# EAGLE board gameboyzero-original (EAGLE 8.4.1)

Size 702.4 x 426.35 mm. Coordinates in mm from the lower left corner, seen from the top.
Outline: 38.1,81.35 38.1,76.85 104.1,76.85 104.1,74.35 109.1,74.35 109.1,81.35 arc90 108.1,82.35 39.1,82.35 arc90 38.1,81.35
Outline: 38.1,45.35 38.1,7.35 arc90 39.1,6.35 108.1,6.35 arc90 109.1,7.35 109.1,73.35 104.1,73.35 104.1,63.35 66.1,63.35 66.1,60.35 81.1,60.35 81.1,49.35 66.1,49.35 66.1,45.35 38.1,45.35
Outline: 38.1,177.35 38.1,85.35 arc90 39.1,84.35 108.1,84.35 arc90 109.1,85.35 109.1,177.35 arc90 108.1,178.35 39.1,178.35 arc90 38.1,177.35
Outline: 84.76,113.55 73.56,117.63 arc90 72.92,117.33 68.47,105.11 arc90 68.77,104.47 79,100.75 75.1,90.05 87.79,85.43 arc90 88.43,85.73 91.19,93.3 102.39,89.23 arc90 103.03,89.53 107.47,101.74 arc90 107.18,102.38 97.42,105.93 arc-90 97.12,106.58 100.67,116.34 arc90 100.38,116.98 88.16,121.43 arc90 87.52,121.13 84.76,113.55
Outline: 53.45,113.5 65.25,101.7 arc-90 65.25,101 53.45,89.2 arc-90 52.75,89.2 40.95,101 arc-90 40.95,101.7 52.75,113.5 arc-90 53.45,113.5
Outline: 44.1,119.85 44.1,115.85 arc90 44.6,115.35 61.6,115.35 arc90 62.1,115.85 62.1,119.85 arc90 61.6,120.35 44.6,120.35 arc90 44.1,119.85
Outline: 75.03,17.69 80.03,28.43 arc90 79.82,29 arc-90 79.58,29.67 86.02,43.47 arc-90 86.69,43.72 98.47,38.22 arc-90 98.71,37.56 92.79,24.86 arc90 93.03,24.19 arc-90 93.24,23.62 87.72,11.78 arc-90 87.05,11.53 75.27,17.03 arc-90 75.03,17.69
Outline: 71.93,17.03 60.15,11.53 arc-90 59.48,11.78 53.96,23.62 arc-90 54.17,24.19 arc90 54.41,24.86 48.49,37.56 arc-90 48.73,38.22 60.52,43.72 arc-90 61.18,43.47 67.62,29.67 arc-90 67.38,29 arc90 67.17,28.43 72.17,17.69 arc-90 71.93,17.03
Outline: 184.1,60.35 184.1,14.35 184.1,7.35 arc90 185.1,6.35 254.1,6.35 arc90 255.1,7.35 255.1,20.35 255.1,34.35 250.1,34.35 250.1,53.35 255.1,53.35 255.1,60.35 arc90 254.1,61.35 185.1,61.35 arc90 184.1,60.35
Outline: 212.1,10.35 227.1,10.35 227.1,21.35 212.1,21.35 212.1,10.35
Outline: 184.1,177.35 184.1,131.35 184.1,124.35 arc90 185.1,123.35 254.1,123.35 arc90 255.1,124.35 255.1,137.35 255.1,151.35 255.1,170.35 255.1,177.35 arc90 254.1,178.35 185.1,178.35 arc90 184.1,177.35
Outline: 0,25.4 0,0 25.4,0 25.4,25.4 0,25.4
Outline: 111.1,177.35 111.1,172.35 182.1,172.35 182.1,177.35 arc90 181.1,178.35 112.1,178.35 arc90 111.1,177.35
Outline: 111.1,170.35 111.1,133.35 arc90 112.1,132.35 181.1,132.35 arc90 182.1,133.35 182.1,170.35 111.1,170.35
Outline: 157.76,161.55 146.56,165.63 arc90 145.92,165.33 141.47,153.11 arc90 141.77,152.47 152,148.75 148.1,138.04 160.79,133.43 arc90 161.43,133.73 164.19,141.3 175.39,137.23 arc90 176.03,137.53 180.47,149.74 arc90 180.18,150.38 170.42,153.93 arc-90 170.12,154.57 173.68,164.34 arc90 173.38,164.98 161.16,169.43 arc90 160.52,169.13 157.76,161.55
Outline: 126.45,161.5 138.25,149.7 arc-90 138.25,149 126.45,137.2 arc-90 125.75,137.2 113.95,149 arc-90 113.95,149.7 125.75,161.5 arc-90 126.45,161.5
Outline: 117.1,167.85 117.1,163.85 arc90 117.6,163.35 134.6,163.35 arc90 135.1,163.85 135.1,167.85 arc90 134.6,168.35 117.6,168.35 arc90 117.1,167.85
Outline: 111.1,129.35 111.1,124.35 182.1,124.35 182.1,129.35 arc90 181.1,130.35 112.1,130.35 arc90 111.1,129.35
Outline: 111.1,122.35 111.1,85.35 arc90 112.1,84.35 181.1,84.35 arc90 182.1,85.35 182.1,122.35 111.1,122.35
Outline: 157.76,113.55 146.56,117.63 arc90 145.92,117.33 141.47,105.11 arc90 141.77,104.47 152,100.75 148.1,90.05 160.79,85.43 arc90 161.43,85.73 164.19,93.3 175.39,89.23 arc90 176.03,89.53 180.47,101.74 arc90 180.18,102.38 170.42,105.93 arc-90 170.12,106.58 173.68,116.34 arc90 173.38,116.98 161.16,121.43 arc90 160.52,121.13 157.76,113.55
Outline: 126.45,113.5 138.25,101.7 arc-90 138.25,101 126.45,89.2 arc-90 125.75,89.2 113.95,101 arc-90 113.95,101.7 125.75,113.5 arc-90 126.45,113.5
Outline: 117.1,119.85 117.1,115.85 arc90 117.6,115.35 134.6,115.35 arc90 135.1,115.85 135.1,119.85 arc90 134.6,120.35 117.6,120.35 arc90 117.1,119.85
Outline: 111.1,81.35 111.1,76.85 177.1,76.85 177.1,74.35 182.1,74.35 182.1,81.35 arc90 181.1,82.35 112.1,82.35 arc90 111.1,81.35
Outline: 111.1,45.35 111.1,7.35 arc90 112.1,6.35 181.1,6.35 arc90 182.1,7.35 182.1,73.35 177.1,73.35 177.1,63.35 139.1,63.35 139.1,60.35 154.1,60.35 154.1,49.35 139.1,49.35 139.1,45.35 111.1,45.35
Outline: 148.03,17.69 153.03,28.43 arc90 152.82,29 arc-90 152.58,29.67 159.02,43.47 arc-90 159.69,43.72 171.47,38.22 arc-90 171.71,37.56 165.79,24.86 arc90 166.03,24.19 arc-90 166.24,23.62 160.72,11.78 arc-90 160.05,11.53 148.27,17.03 arc-90 148.03,17.69
Outline: 144.93,17.03 133.15,11.53 arc-90 132.49,11.78 126.96,23.62 arc-90 127.17,24.19 arc90 127.41,24.86 121.49,37.56 arc-90 121.73,38.22 133.51,43.72 arc-90 134.18,43.47 140.62,29.67 arc-90 140.38,29 arc90 140.17,28.43 145.17,17.69 arc-90 144.93,17.03
Outline: 184.1,119.1 184.1,73.1 184.1,66.1 arc90 185.1,65.1 254.1,65.1 arc90 255.1,66.1 255.1,79.1 255.1,93.1 250.1,93.1 250.1,112.1 255.1,112.1 255.1,119.1 arc90 254.1,120.1 185.1,120.1 arc90 184.1,119.1
Outline: 212.1,69.1 227.1,69.1 227.1,80.1 212.1,80.1 212.1,69.1
Outline: 257.1,81.35 257.1,76.85 323.1,76.85 323.1,74.35 328.1,74.35 328.1,81.35 arc90 327.1,82.35 258.1,82.35 arc90 257.1,81.35
Outline: 257.1,45.35 257.1,7.35 arc90 258.1,6.35 327.1,6.35 arc90 328.1,7.35 328.1,73.35 323.1,73.35 323.1,63.35 285.1,63.35 285.1,60.35 300.1,60.35 300.1,49.35 285.1,49.35 285.1,45.35 257.1,45.35
Outline: 257.1,177.35 257.1,85.35 arc90 258.1,84.35 327.1,84.35 arc90 328.1,85.35 328.1,177.35 arc90 327.1,178.35 258.1,178.35 arc90 257.1,177.35
Outline: 303.76,113.55 292.56,117.63 arc90 291.92,117.33 287.47,105.11 arc90 287.77,104.47 298,100.75 294.1,90.05 306.79,85.43 arc90 307.43,85.73 310.19,93.3 321.39,89.23 arc90 322.03,89.53 326.48,101.74 arc90 326.18,102.38 316.42,105.93 arc-90 316.12,106.58 319.68,116.34 arc90 319.38,116.98 307.16,121.43 arc90 306.52,121.13 303.76,113.55
Outline: 272.45,113.5 284.25,101.7 arc-90 284.25,101 272.45,89.2 arc-90 271.75,89.2 259.95,101 arc-90 259.95,101.7 271.75,113.5 arc-90 272.45,113.5
Outline: 263.1,119.85 263.1,115.85 arc90 263.6,115.35 280.6,115.35 arc90 281.1,115.85 281.1,119.85 arc90 280.6,120.35 263.6,120.35 arc90 263.1,119.85
Outline: 294.03,17.69 299.03,28.43 arc90 298.82,29 arc-90 298.58,29.67 305.02,43.47 arc-90 305.69,43.72 317.47,38.22 arc-90 317.71,37.56 311.79,24.86 arc90 312.03,24.19 arc-90 312.24,23.62 306.71,11.78 arc-90 306.05,11.53 294.27,17.03 arc-90 294.03,17.69
Outline: 290.93,17.03 279.15,11.53 arc-90 278.49,11.78 272.96,23.62 arc-90 273.17,24.19 arc90 273.41,24.86 267.49,37.56 arc-90 267.73,38.22 279.51,43.72 arc-90 280.18,43.47 286.62,29.67 arc-90 286.38,29 arc90 286.17,28.43 291.17,17.69 arc-90 290.93,17.03
Outline: 403.1,60.35 403.1,14.35 403.1,7.35 arc90 404.1,6.35 473.1,6.35 arc90 474.1,7.35 474.1,20.35 474.1,34.35 469.1,34.35 469.1,53.35 474.1,53.35 474.1,60.35 arc90 473.1,61.35 404.1,61.35 arc90 403.1,60.35
Outline: 431.1,10.35 446.1,10.35 446.1,21.35 431.1,21.35 431.1,10.35
Outline: 403.1,177.35 403.1,131.35 403.1,124.35 arc90 404.1,123.35 473.1,123.35 arc90 474.1,124.35 474.1,137.35 474.1,151.35 474.1,170.35 474.1,177.35 arc90 473.1,178.35 404.1,178.35 arc90 403.1,177.35
Outline: 330.1,177.35 330.1,172.35 401.1,172.35 401.1,177.35 arc90 400.1,178.35 331.1,178.35 arc90 330.1,177.35
Outline: 330.1,170.35 330.1,133.35 arc90 331.1,132.35 400.1,132.35 arc90 401.1,133.35 401.1,170.35 330.1,170.35
Outline: 376.76,161.55 365.56,165.63 arc90 364.92,165.33 360.47,153.11 arc90 360.77,152.47 371,148.75 367.1,138.04 379.79,133.43 arc90 380.43,133.73 383.19,141.3 394.39,137.23 arc90 395.03,137.53 399.48,149.74 arc90 399.18,150.38 389.42,153.93 arc-90 389.12,154.57 392.68,164.34 arc90 392.38,164.98 380.16,169.43 arc90 379.52,169.13 376.76,161.55
Outline: 345.45,161.5 357.25,149.7 arc-90 357.25,149 345.45,137.2 arc-90 344.75,137.2 332.95,149 arc-90 332.95,149.7 344.75,161.5 arc-90 345.45,161.5
Outline: 336.1,167.85 336.1,163.85 arc90 336.6,163.35 353.6,163.35 arc90 354.1,163.85 354.1,167.85 arc90 353.6,168.35 336.6,168.35 arc90 336.1,167.85
Outline: 330.1,129.35 330.1,124.35 401.1,124.35 401.1,129.35 arc90 400.1,130.35 331.1,130.35 arc90 330.1,129.35
Outline: 330.1,122.35 330.1,85.35 arc90 331.1,84.35 400.1,84.35 arc90 401.1,85.35 401.1,122.35 330.1,122.35
Outline: 376.76,113.55 365.56,117.63 arc90 364.92,117.33 360.47,105.11 arc90 360.77,104.47 371,100.75 367.1,90.05 379.79,85.43 arc90 380.43,85.73 383.19,93.3 394.39,89.23 arc90 395.03,89.53 399.48,101.74 arc90 399.18,102.38 389.42,105.93 arc-90 389.12,106.58 392.68,116.34 arc90 392.38,116.98 380.16,121.43 arc90 379.52,121.13 376.76,113.55
Outline: 345.45,113.5 357.25,101.7 arc-90 357.25,101 345.45,89.2 arc-90 344.75,89.2 332.95,101 arc-90 332.95,101.7 344.75,113.5 arc-90 345.45,113.5
Outline: 336.1,119.85 336.1,115.85 arc90 336.6,115.35 353.6,115.35 arc90 354.1,115.85 354.1,119.85 arc90 353.6,120.35 336.6,120.35 arc90 336.1,119.85
Outline: 330.1,81.35 330.1,76.85 396.1,76.85 396.1,74.35 401.1,74.35 401.1,81.35 arc90 400.1,82.35 331.1,82.35 arc90 330.1,81.35
Outline: 330.1,45.35 330.1,7.35 arc90 331.1,6.35 400.1,6.35 arc90 401.1,7.35 401.1,73.35 396.1,73.35 396.1,63.35 358.1,63.35 358.1,60.35 373.1,60.35 373.1,49.35 358.1,49.35 358.1,45.35 330.1,45.35
Outline: 367.03,17.69 372.03,28.43 arc90 371.82,29 arc-90 371.58,29.67 378.02,43.47 arc-90 378.69,43.72 390.47,38.22 arc-90 390.71,37.56 384.79,24.86 arc90 385.03,24.19 arc-90 385.24,23.62 379.71,11.78 arc-90 379.05,11.53 367.27,17.03 arc-90 367.03,17.69
Outline: 363.93,17.03 352.15,11.53 arc-90 351.49,11.78 345.96,23.62 arc-90 346.17,24.19 arc90 346.41,24.86 340.49,37.56 arc-90 340.73,38.22 352.51,43.72 arc-90 353.18,43.47 359.62,29.67 arc-90 359.38,29 arc90 359.17,28.43 364.17,17.69 arc-90 363.93,17.03
Outline: 403.1,119.1 403.1,73.1 403.1,66.1 arc90 404.1,65.1 473.1,65.1 arc90 474.1,66.1 474.1,79.1 474.1,93.1 469.1,93.1 469.1,112.1 474.1,112.1 474.1,119.1 arc90 473.1,120.1 404.1,120.1 arc90 403.1,119.1
Outline: 431.1,69.1 446.1,69.1 446.1,80.1 431.1,80.1 431.1,69.1
Outline: 476.1,81.35 476.1,76.85 542.1,76.85 542.1,74.35 547.1,74.35 547.1,81.35 arc90 546.1,82.35 477.1,82.35 arc90 476.1,81.35
Outline: 476.1,45.35 476.1,7.35 arc90 477.1,6.35 546.1,6.35 arc90 547.1,7.35 547.1,73.35 542.1,73.35 542.1,63.35 504.1,63.35 504.1,60.35 519.1,60.35 519.1,49.35 504.1,49.35 504.1,45.35 476.1,45.35
Outline: 476.1,177.35 476.1,85.35 arc90 477.1,84.35 546.1,84.35 arc90 547.1,85.35 547.1,177.35 arc90 546.1,178.35 477.1,178.35 arc90 476.1,177.35
Outline: 522.76,113.55 511.56,117.63 arc90 510.92,117.33 506.47,105.11 arc90 506.77,104.47 517,100.75 513.1,90.05 525.79,85.43 arc90 526.43,85.73 529.19,93.3 540.39,89.23 arc90 541.03,89.53 545.48,101.74 arc90 545.18,102.38 535.42,105.93 arc-90 535.12,106.58 538.67,116.34 arc90 538.38,116.98 526.16,121.43 arc90 525.52,121.13 522.76,113.55
Outline: 491.45,113.5 503.25,101.7 arc-90 503.25,101 491.45,89.2 arc-90 490.75,89.2 478.95,101 arc-90 478.95,101.7 490.75,113.5 arc-90 491.45,113.5
Outline: 482.1,119.85 482.1,115.85 arc90 482.6,115.35 499.6,115.35 arc90 500.1,115.85 500.1,119.85 arc90 499.6,120.35 482.6,120.35 arc90 482.1,119.85
Outline: 513.03,17.69 518.03,28.43 arc90 517.82,29 arc-90 517.58,29.67 524.02,43.47 arc-90 524.68,43.72 536.47,38.22 arc-90 536.71,37.56 530.79,24.86 arc90 531.03,24.19 arc-90 531.24,23.62 525.71,11.78 arc-90 525.05,11.53 513.27,17.03 arc-90 513.03,17.69
Outline: 509.93,17.03 498.15,11.53 arc-90 497.49,11.78 491.96,23.62 arc-90 492.17,24.19 arc90 492.41,24.86 486.49,37.56 arc-90 486.73,38.22 498.51,43.72 arc-90 499.18,43.47 505.62,29.67 arc-90 505.38,29 arc90 505.17,28.43 510.17,17.69 arc-90 509.93,17.03
Outline: 622.1,60.35 622.1,14.35 622.1,7.35 arc90 623.1,6.35 692.1,6.35 arc90 693.1,7.35 693.1,20.35 693.1,34.35 688.1,34.35 688.1,53.35 693.1,53.35 693.1,60.35 arc90 692.1,61.35 623.1,61.35 arc90 622.1,60.35
Outline: 650.1,10.35 665.1,10.35 665.1,21.35 650.1,21.35 650.1,10.35
Outline: 622.1,177.35 622.1,131.35 622.1,124.35 arc90 623.1,123.35 692.1,123.35 arc90 693.1,124.35 693.1,137.35 693.1,151.35 693.1,170.35 693.1,177.35 arc90 692.1,178.35 623.1,178.35 arc90 622.1,177.35
Outline: 549.1,177.35 549.1,172.35 620.1,172.35 620.1,177.35 arc90 619.1,178.35 550.1,178.35 arc90 549.1,177.35
Outline: 549.1,170.35 549.1,133.35 arc90 550.1,132.35 619.1,132.35 arc90 620.1,133.35 620.1,170.35 549.1,170.35
Outline: 595.76,161.55 584.56,165.63 arc90 583.92,165.33 579.47,153.11 arc90 579.77,152.47 590,148.75 586.1,138.04 598.79,133.43 arc90 599.43,133.73 602.19,141.3 613.39,137.23 arc90 614.03,137.53 618.48,149.74 arc90 618.18,150.38 608.42,153.93 arc-90 608.12,154.57 611.67,164.34 arc90 611.38,164.98 599.16,169.43 arc90 598.52,169.13 595.76,161.55
Outline: 564.45,161.5 576.25,149.7 arc-90 576.25,149 564.45,137.2 arc-90 563.75,137.2 551.95,149 arc-90 551.95,149.7 563.75,161.5 arc-90 564.45,161.5
Outline: 555.1,167.85 555.1,163.85 arc90 555.6,163.35 572.6,163.35 arc90 573.1,163.85 573.1,167.85 arc90 572.6,168.35 555.6,168.35 arc90 555.1,167.85
Outline: 549.1,129.35 549.1,124.35 620.1,124.35 620.1,129.35 arc90 619.1,130.35 550.1,130.35 arc90 549.1,129.35
Outline: 549.1,122.35 549.1,85.35 arc90 550.1,84.35 619.1,84.35 arc90 620.1,85.35 620.1,122.35 549.1,122.35
Outline: 595.76,113.55 584.56,117.63 arc90 583.92,117.33 579.47,105.11 arc90 579.77,104.47 590,100.75 586.1,90.05 598.79,85.43 arc90 599.43,85.73 602.19,93.3 613.39,89.23 arc90 614.03,89.53 618.48,101.74 arc90 618.18,102.38 608.42,105.93 arc-90 608.12,106.58 611.67,116.34 arc90 611.38,116.98 599.16,121.43 arc90 598.52,121.13 595.76,113.55
Outline: 564.45,113.5 576.25,101.7 arc-90 576.25,101 564.45,89.2 arc-90 563.75,89.2 551.95,101 arc-90 551.95,101.7 563.75,113.5 arc-90 564.45,113.5
Outline: 555.1,119.85 555.1,115.85 arc90 555.6,115.35 572.6,115.35 arc90 573.1,115.85 573.1,119.85 arc90 572.6,120.35 555.6,120.35 arc90 555.1,119.85
Outline: 549.1,81.35 549.1,76.85 615.1,76.85 615.1,74.35 620.1,74.35 620.1,81.35 arc90 619.1,82.35 550.1,82.35 arc90 549.1,81.35
Outline: 549.1,45.35 549.1,7.35 arc90 550.1,6.35 619.1,6.35 arc90 620.1,7.35 620.1,73.35 615.1,73.35 615.1,63.35 577.1,63.35 577.1,60.35 592.1,60.35 592.1,49.35 577.1,49.35 577.1,45.35 549.1,45.35
Outline: 586.03,17.69 591.03,28.43 arc90 590.82,29 arc-90 590.58,29.67 597.02,43.47 arc-90 597.68,43.72 609.47,38.22 arc-90 609.71,37.56 603.79,24.86 arc90 604.03,24.19 arc-90 604.24,23.62 598.72,11.78 arc-90 598.05,11.53 586.27,17.03 arc-90 586.03,17.69
Outline: 582.93,17.03 571.15,11.53 arc-90 570.49,11.78 564.96,23.62 arc-90 565.17,24.19 arc90 565.41,24.86 559.49,37.56 arc-90 559.73,38.22 571.51,43.72 arc-90 572.18,43.47 578.62,29.67 arc-90 578.38,29 arc90 578.17,28.43 583.17,17.69 arc-90 582.93,17.03
Outline: 622.1,119.1 622.1,73.1 622.1,66.1 arc90 623.1,65.1 692.1,65.1 arc90 693.1,66.1 693.1,79.1 693.1,93.1 688.1,93.1 688.1,112.1 693.1,112.1 693.1,119.1 arc90 692.1,120.1 623.1,120.1 arc90 622.1,119.1
Outline: 650.1,69.1 665.1,69.1 665.1,80.1 650.1,80.1 650.1,69.1
Outline: 38.1,256.35 38.1,251.85 104.1,251.85 104.1,249.35 109.1,249.35 109.1,256.35 arc90 108.1,257.35 39.1,257.35 arc90 38.1,256.35
Outline: 38.1,220.35 38.1,182.35 arc90 39.1,181.35 108.1,181.35 arc90 109.1,182.35 109.1,248.35 104.1,248.35 104.1,238.35 66.1,238.35 66.1,235.35 81.1,235.35 81.1,224.35 66.1,224.35 66.1,220.35 38.1,220.35
Outline: 38.1,352.35 38.1,260.35 arc90 39.1,259.35 108.1,259.35 arc90 109.1,260.35 109.1,352.35 arc90 108.1,353.35 39.1,353.35 arc90 38.1,352.35
Outline: 84.76,288.55 73.56,292.63 arc90 72.92,292.33 68.47,280.11 arc90 68.77,279.47 79,275.75 75.1,265.05 87.79,260.43 arc90 88.43,260.73 91.19,268.3 102.39,264.23 arc90 103.03,264.53 107.47,276.74 arc90 107.18,277.38 97.42,280.93 arc-90 97.12,281.57 100.67,291.34 arc90 100.38,291.98 88.16,296.43 arc90 87.52,296.13 84.76,288.55
Outline: 53.45,288.5 65.25,276.7 arc-90 65.25,276 53.45,264.2 arc-90 52.75,264.2 40.95,276 arc-90 40.95,276.7 52.75,288.5 arc-90 53.45,288.5
Outline: 44.1,294.85 44.1,290.85 arc90 44.6,290.35 61.6,290.35 arc90 62.1,290.85 62.1,294.85 arc90 61.6,295.35 44.6,295.35 arc90 44.1,294.85
Outline: 75.03,192.69 80.03,203.43 arc90 79.82,204 arc-90 79.58,204.67 86.02,218.47 arc-90 86.69,218.72 98.47,213.22 arc-90 98.71,212.56 92.79,199.86 arc90 93.03,199.19 arc-90 93.24,198.62 87.72,186.78 arc-90 87.05,186.53 75.27,192.03 arc-90 75.03,192.69
Outline: 71.93,192.03 60.15,186.53 arc-90 59.48,186.78 53.96,198.62 arc-90 54.17,199.19 arc90 54.41,199.86 48.49,212.56 arc-90 48.73,213.22 60.52,218.72 arc-90 61.18,218.47 67.62,204.67 arc-90 67.38,204 arc90 67.17,203.43 72.17,192.69 arc-90 71.93,192.03
Outline: 184.1,235.35 184.1,189.35 184.1,182.35 arc90 185.1,181.35 254.1,181.35 arc90 255.1,182.35 255.1,195.35 255.1,209.35 250.1,209.35 250.1,228.35 255.1,228.35 255.1,235.35 arc90 254.1,236.35 185.1,236.35 arc90 184.1,235.35
Outline: 212.1,185.35 227.1,185.35 227.1,196.35 212.1,196.35 212.1,185.35
Outline: 184.1,352.35 184.1,306.35 184.1,299.35 arc90 185.1,298.35 254.1,298.35 arc90 255.1,299.35 255.1,312.35 255.1,326.35 255.1,345.35 255.1,352.35 arc90 254.1,353.35 185.1,353.35 arc90 184.1,352.35
Outline: 111.1,352.35 111.1,347.35 182.1,347.35 182.1,352.35 arc90 181.1,353.35 112.1,353.35 arc90 111.1,352.35
Outline: 111.1,345.35 111.1,308.35 arc90 112.1,307.35 181.1,307.35 arc90 182.1,308.35 182.1,345.35 111.1,345.35
Outline: 157.76,336.55 146.56,340.63 arc90 145.92,340.33 141.47,328.11 arc90 141.77,327.47 152,323.75 148.1,313.05 160.79,308.43 arc90 161.43,308.73 164.19,316.3 175.39,312.23 arc90 176.03,312.53 180.47,324.74 arc90 180.18,325.38 170.42,328.93 arc-90 170.12,329.57 173.68,339.34 arc90 173.38,339.98 161.16,344.43 arc90 160.52,344.13 157.76,336.55
Outline: 126.45,336.5 138.25,324.7 arc-90 138.25,324 126.45,312.2 arc-90 125.75,312.2 113.95,324 arc-90 113.95,324.7 125.75,336.5 arc-90 126.45,336.5
Outline: 117.1,342.85 117.1,338.85 arc90 117.6,338.35 134.6,338.35 arc90 135.1,338.85 135.1,342.85 arc90 134.6,343.35 117.6,343.35 arc90 117.1,342.85
Outline: 111.1,304.35 111.1,299.35 182.1,299.35 182.1,304.35 arc90 181.1,305.35 112.1,305.35 arc90 111.1,304.35
Outline: 111.1,297.35 111.1,260.35 arc90 112.1,259.35 181.1,259.35 arc90 182.1,260.35 182.1,297.35 111.1,297.35
Outline: 157.76,288.55 146.56,292.63 arc90 145.92,292.33 141.47,280.11 arc90 141.77,279.47 152,275.75 148.1,265.05 160.79,260.43 arc90 161.43,260.73 164.19,268.3 175.39,264.23 arc90 176.03,264.53 180.47,276.74 arc90 180.18,277.38 170.42,280.93 arc-90 170.12,281.57 173.68,291.34 arc90 173.38,291.98 161.16,296.43 arc90 160.52,296.13 157.76,288.55
Outline: 126.45,288.5 138.25,276.7 arc-90 138.25,276 126.45,264.2 arc-90 125.75,264.2 113.95,276 arc-90 113.95,276.7 125.75,288.5 arc-90 126.45,288.5
Outline: 117.1,294.85 117.1,290.85 arc90 117.6,290.35 134.6,290.35 arc90 135.1,290.85 135.1,294.85 arc90 134.6,295.35 117.6,295.35 arc90 117.1,294.85
Outline: 111.1,256.35 111.1,251.85 177.1,251.85 177.1,249.35 182.1,249.35 182.1,256.35 arc90 181.1,257.35 112.1,257.35 arc90 111.1,256.35
Outline: 111.1,220.35 111.1,182.35 arc90 112.1,181.35 181.1,181.35 arc90 182.1,182.35 182.1,248.35 177.1,248.35 177.1,238.35 139.1,238.35 139.1,235.35 154.1,235.35 154.1,224.35 139.1,224.35 139.1,220.35 111.1,220.35
Outline: 148.03,192.69 153.03,203.43 arc90 152.82,204 arc-90 152.58,204.67 159.02,218.47 arc-90 159.69,218.72 171.47,213.22 arc-90 171.71,212.56 165.79,199.86 arc90 166.03,199.19 arc-90 166.24,198.62 160.72,186.78 arc-90 160.05,186.53 148.27,192.03 arc-90 148.03,192.69
Outline: 144.93,192.03 133.15,186.53 arc-90 132.49,186.78 126.96,198.62 arc-90 127.17,199.19 arc90 127.41,199.86 121.49,212.56 arc-90 121.73,213.22 133.51,218.72 arc-90 134.18,218.47 140.62,204.67 arc-90 140.38,204 arc90 140.17,203.43 145.17,192.69 arc-90 144.93,192.03
Outline: 184.1,294.1 184.1,248.1 184.1,241.1 arc90 185.1,240.1 254.1,240.1 arc90 255.1,241.1 255.1,254.1 255.1,268.1 250.1,268.1 250.1,287.1 255.1,287.1 255.1,294.1 arc90 254.1,295.1 185.1,295.1 arc90 184.1,294.1
Outline: 212.1,244.1 227.1,244.1 227.1,255.1 212.1,255.1 212.1,244.1
Outline: 257.1,256.35 257.1,251.85 323.1,251.85 323.1,249.35 328.1,249.35 328.1,256.35 arc90 327.1,257.35 258.1,257.35 arc90 257.1,256.35
Outline: 257.1,220.35 257.1,182.35 arc90 258.1,181.35 327.1,181.35 arc90 328.1,182.35 328.1,248.35 323.1,248.35 323.1,238.35 285.1,238.35 285.1,235.35 300.1,235.35 300.1,224.35 285.1,224.35 285.1,220.35 257.1,220.35
Outline: 257.1,352.35 257.1,260.35 arc90 258.1,259.35 327.1,259.35 arc90 328.1,260.35 328.1,352.35 arc90 327.1,353.35 258.1,353.35 arc90 257.1,352.35
Outline: 303.76,288.55 292.56,292.63 arc90 291.92,292.33 287.47,280.11 arc90 287.77,279.47 298,275.75 294.1,265.05 306.79,260.43 arc90 307.43,260.73 310.19,268.3 321.39,264.23 arc90 322.03,264.53 326.48,276.74 arc90 326.18,277.38 316.42,280.93 arc-90 316.12,281.57 319.68,291.34 arc90 319.38,291.98 307.16,296.43 arc90 306.52,296.13 303.76,288.55
Outline: 272.45,288.5 284.25,276.7 arc-90 284.25,276 272.45,264.2 arc-90 271.75,264.2 259.95,276 arc-90 259.95,276.7 271.75,288.5 arc-90 272.45,288.5
Outline: 263.1,294.85 263.1,290.85 arc90 263.6,290.35 280.6,290.35 arc90 281.1,290.85 281.1,294.85 arc90 280.6,295.35 263.6,295.35 arc90 263.1,294.85
Outline: 294.03,192.69 299.03,203.43 arc90 298.82,204 arc-90 298.58,204.67 305.02,218.47 arc-90 305.69,218.72 317.47,213.22 arc-90 317.71,212.56 311.79,199.86 arc90 312.03,199.19 arc-90 312.24,198.62 306.71,186.78 arc-90 306.05,186.53 294.27,192.03 arc-90 294.03,192.69
Outline: 290.93,192.03 279.15,186.53 arc-90 278.49,186.78 272.96,198.62 arc-90 273.17,199.19 arc90 273.41,199.86 267.49,212.56 arc-90 267.73,213.22 279.51,218.72 arc-90 280.18,218.47 286.62,204.67 arc-90 286.38,204 arc90 286.17,203.43 291.17,192.69 arc-90 290.93,192.03
Outline: 403.1,235.35 403.1,189.35 403.1,182.35 arc90 404.1,181.35 473.1,181.35 arc90 474.1,182.35 474.1,195.35 474.1,209.35 469.1,209.35 469.1,228.35 474.1,228.35 474.1,235.35 arc90 473.1,236.35 404.1,236.35 arc90 403.1,235.35
Outline: 431.1,185.35 446.1,185.35 446.1,196.35 431.1,196.35 431.1,185.35
Outline: 403.1,352.35 403.1,306.35 403.1,299.35 arc90 404.1,298.35 473.1,298.35 arc90 474.1,299.35 474.1,312.35 474.1,326.35 474.1,345.35 474.1,352.35 arc90 473.1,353.35 404.1,353.35 arc90 403.1,352.35
Outline: 330.1,352.35 330.1,347.35 401.1,347.35 401.1,352.35 arc90 400.1,353.35 331.1,353.35 arc90 330.1,352.35
Outline: 330.1,345.35 330.1,308.35 arc90 331.1,307.35 400.1,307.35 arc90 401.1,308.35 401.1,345.35 330.1,345.35
Outline: 376.76,336.55 365.56,340.63 arc90 364.92,340.33 360.47,328.11 arc90 360.77,327.47 371,323.75 367.1,313.05 379.79,308.43 arc90 380.43,308.73 383.19,316.3 394.39,312.23 arc90 395.03,312.53 399.48,324.74 arc90 399.18,325.38 389.42,328.93 arc-90 389.12,329.57 392.68,339.34 arc90 392.38,339.98 380.16,344.43 arc90 379.52,344.13 376.76,336.55
Outline: 345.45,336.5 357.25,324.7 arc-90 357.25,324 345.45,312.2 arc-90 344.75,312.2 332.95,324 arc-90 332.95,324.7 344.75,336.5 arc-90 345.45,336.5
Outline: 336.1,342.85 336.1,338.85 arc90 336.6,338.35 353.6,338.35 arc90 354.1,338.85 354.1,342.85 arc90 353.6,343.35 336.6,343.35 arc90 336.1,342.85
Outline: 330.1,304.35 330.1,299.35 401.1,299.35 401.1,304.35 arc90 400.1,305.35 331.1,305.35 arc90 330.1,304.35
Outline: 330.1,297.35 330.1,260.35 arc90 331.1,259.35 400.1,259.35 arc90 401.1,260.35 401.1,297.35 330.1,297.35
Outline: 376.76,288.55 365.56,292.63 arc90 364.92,292.33 360.47,280.11 arc90 360.77,279.47 371,275.75 367.1,265.05 379.79,260.43 arc90 380.43,260.73 383.19,268.3 394.39,264.23 arc90 395.03,264.53 399.48,276.74 arc90 399.18,277.38 389.42,280.93 arc-90 389.12,281.57 392.68,291.34 arc90 392.38,291.98 380.16,296.43 arc90 379.52,296.13 376.76,288.55
Outline: 345.45,288.5 357.25,276.7 arc-90 357.25,276 345.45,264.2 arc-90 344.75,264.2 332.95,276 arc-90 332.95,276.7 344.75,288.5 arc-90 345.45,288.5
Outline: 336.1,294.85 336.1,290.85 arc90 336.6,290.35 353.6,290.35 arc90 354.1,290.85 354.1,294.85 arc90 353.6,295.35 336.6,295.35 arc90 336.1,294.85
Outline: 330.1,256.35 330.1,251.85 396.1,251.85 396.1,249.35 401.1,249.35 401.1,256.35 arc90 400.1,257.35 331.1,257.35 arc90 330.1,256.35
Outline: 330.1,220.35 330.1,182.35 arc90 331.1,181.35 400.1,181.35 arc90 401.1,182.35 401.1,248.35 396.1,248.35 396.1,238.35 358.1,238.35 358.1,235.35 373.1,235.35 373.1,224.35 358.1,224.35 358.1,220.35 330.1,220.35
Outline: 367.03,192.69 372.03,203.43 arc90 371.82,204 arc-90 371.58,204.67 378.02,218.47 arc-90 378.69,218.72 390.47,213.22 arc-90 390.71,212.56 384.79,199.86 arc90 385.03,199.19 arc-90 385.24,198.62 379.71,186.78 arc-90 379.05,186.53 367.27,192.03 arc-90 367.03,192.69
Outline: 363.93,192.03 352.15,186.53 arc-90 351.49,186.78 345.96,198.62 arc-90 346.17,199.19 arc90 346.41,199.86 340.49,212.56 arc-90 340.73,213.22 352.51,218.72 arc-90 353.18,218.47 359.62,204.67 arc-90 359.38,204 arc90 359.17,203.43 364.17,192.69 arc-90 363.93,192.03
Outline: 403.1,294.1 403.1,248.1 403.1,241.1 arc90 404.1,240.1 473.1,240.1 arc90 474.1,241.1 474.1,254.1 474.1,268.1 469.1,268.1 469.1,287.1 474.1,287.1 474.1,294.1 arc90 473.1,295.1 404.1,295.1 arc90 403.1,294.1
Outline: 431.1,244.1 446.1,244.1 446.1,255.1 431.1,255.1 431.1,244.1
Outline: 476.1,256.35 476.1,251.85 542.1,251.85 542.1,249.35 547.1,249.35 547.1,256.35 arc90 546.1,257.35 477.1,257.35 arc90 476.1,256.35
Outline: 476.1,220.35 476.1,182.35 arc90 477.1,181.35 546.1,181.35 arc90 547.1,182.35 547.1,248.35 542.1,248.35 542.1,238.35 504.1,238.35 504.1,235.35 519.1,235.35 519.1,224.35 504.1,224.35 504.1,220.35 476.1,220.35
Outline: 476.1,352.35 476.1,260.35 arc90 477.1,259.35 546.1,259.35 arc90 547.1,260.35 547.1,352.35 arc90 546.1,353.35 477.1,353.35 arc90 476.1,352.35
Outline: 522.76,288.55 511.56,292.63 arc90 510.92,292.33 506.47,280.11 arc90 506.77,279.47 517,275.75 513.1,265.05 525.79,260.43 arc90 526.43,260.73 529.19,268.3 540.39,264.23 arc90 541.03,264.53 545.48,276.74 arc90 545.18,277.38 535.42,280.93 arc-90 535.12,281.57 538.67,291.34 arc90 538.38,291.98 526.16,296.43 arc90 525.52,296.13 522.76,288.55
Outline: 491.45,288.5 503.25,276.7 arc-90 503.25,276 491.45,264.2 arc-90 490.75,264.2 478.95,276 arc-90 478.95,276.7 490.75,288.5 arc-90 491.45,288.5
Outline: 482.1,294.85 482.1,290.85 arc90 482.6,290.35 499.6,290.35 arc90 500.1,290.85 500.1,294.85 arc90 499.6,295.35 482.6,295.35 arc90 482.1,294.85
Outline: 513.03,192.69 518.03,203.43 arc90 517.82,204 arc-90 517.58,204.67 524.02,218.47 arc-90 524.68,218.72 536.47,213.22 arc-90 536.71,212.56 530.79,199.86 arc90 531.03,199.19 arc-90 531.24,198.62 525.71,186.78 arc-90 525.05,186.53 513.27,192.03 arc-90 513.03,192.69
Outline: 509.93,192.03 498.15,186.53 arc-90 497.49,186.78 491.96,198.62 arc-90 492.17,199.19 arc90 492.41,199.86 486.49,212.56 arc-90 486.73,213.22 498.51,218.72 arc-90 499.18,218.47 505.62,204.67 arc-90 505.38,204 arc90 505.17,203.43 510.17,192.69 arc-90 509.93,192.03
Outline: 622.1,235.35 622.1,189.35 622.1,182.35 arc90 623.1,181.35 692.1,181.35 arc90 693.1,182.35 693.1,195.35 693.1,209.35 688.1,209.35 688.1,228.35 693.1,228.35 693.1,235.35 arc90 692.1,236.35 623.1,236.35 arc90 622.1,235.35
Outline: 650.1,185.35 665.1,185.35 665.1,196.35 650.1,196.35 650.1,185.35
Outline: 622.1,352.35 622.1,306.35 622.1,299.35 arc90 623.1,298.35 692.1,298.35 arc90 693.1,299.35 693.1,312.35 693.1,326.35 693.1,345.35 693.1,352.35 arc90 692.1,353.35 623.1,353.35 arc90 622.1,352.35
Outline: 549.1,352.35 549.1,347.35 620.1,347.35 620.1,352.35 arc90 619.1,353.35 550.1,353.35 arc90 549.1,352.35
Outline: 549.1,345.35 549.1,308.35 arc90 550.1,307.35 619.1,307.35 arc90 620.1,308.35 620.1,345.35 549.1,345.35
Outline: 595.76,336.55 584.56,340.63 arc90 583.92,340.33 579.47,328.11 arc90 579.77,327.47 590,323.75 586.1,313.05 598.79,308.43 arc90 599.43,308.73 602.19,316.3 613.39,312.23 arc90 614.03,312.53 618.48,324.74 arc90 618.18,325.38 608.42,328.93 arc-90 608.12,329.57 611.67,339.34 arc90 611.38,339.98 599.16,344.43 arc90 598.52,344.13 595.76,336.55
Outline: 564.45,336.5 576.25,324.7 arc-90 576.25,324 564.45,312.2 arc-90 563.75,312.2 551.95,324 arc-90 551.95,324.7 563.75,336.5 arc-90 564.45,336.5
Outline: 555.1,342.85 555.1,338.85 arc90 555.6,338.35 572.6,338.35 arc90 573.1,338.85 573.1,342.85 arc90 572.6,343.35 555.6,343.35 arc90 555.1,342.85
Outline: 549.1,304.35 549.1,299.35 620.1,299.35 620.1,304.35 arc90 619.1,305.35 550.1,305.35 arc90 549.1,304.35
Outline: 549.1,297.35 549.1,260.35 arc90 550.1,259.35 619.1,259.35 arc90 620.1,260.35 620.1,297.35 549.1,297.35
Outline: 595.76,288.55 584.56,292.63 arc90 583.92,292.33 579.47,280.11 arc90 579.77,279.47 590,275.75 586.1,265.05 598.79,260.43 arc90 599.43,260.73 602.19,268.3 613.39,264.23 arc90 614.03,264.53 618.48,276.74 arc90 618.18,277.38 608.42,280.93 arc-90 608.12,281.57 611.67,291.34 arc90 611.38,291.98 599.16,296.43 arc90 598.52,296.13 595.76,288.55
Outline: 564.45,288.5 576.25,276.7 arc-90 576.25,276 564.45,264.2 arc-90 563.75,264.2 551.95,276 arc-90 551.95,276.7 563.75,288.5 arc-90 564.45,288.5
Outline: 555.1,294.85 555.1,290.85 arc90 555.6,290.35 572.6,290.35 arc90 573.1,290.85 573.1,294.85 arc90 572.6,295.35 555.6,295.35 arc90 555.1,294.85
Outline: 549.1,256.35 549.1,251.85 615.1,251.85 615.1,249.35 620.1,249.35 620.1,256.35 arc90 619.1,257.35 550.1,257.35 arc90 549.1,256.35
Outline: 549.1,220.35 549.1,182.35 arc90 550.1,181.35 619.1,181.35 arc90 620.1,182.35 620.1,248.35 615.1,248.35 615.1,238.35 577.1,238.35 577.1,235.35 592.1,235.35 592.1,224.35 577.1,224.35 577.1,220.35 549.1,220.35
Outline: 586.03,192.69 591.03,203.43 arc90 590.82,204 arc-90 590.58,204.67 597.02,218.47 arc-90 597.68,218.72 609.47,213.22 arc-90 609.71,212.56 603.79,199.86 arc90 604.03,199.19 arc-90 604.24,198.62 598.72,186.78 arc-90 598.05,186.53 586.27,192.03 arc-90 586.03,192.69
Outline: 582.93,192.03 571.15,186.53 arc-90 570.49,186.78 564.96,198.62 arc-90 565.17,199.19 arc90 565.41,199.86 559.49,212.56 arc-90 559.73,213.22 571.51,218.72 arc-90 572.18,218.47 578.62,204.67 arc-90 578.38,204 arc90 578.17,203.43 583.17,192.69 arc-90 582.93,192.03
Outline: 622.1,294.1 622.1,248.1 622.1,241.1 arc90 623.1,240.1 692.1,240.1 arc90 693.1,241.1 693.1,254.1 693.1,268.1 688.1,268.1 688.1,287.1 693.1,287.1 693.1,294.1 arc90 692.1,295.1 623.1,295.1 arc90 622.1,294.1
Outline: 650.1,244.1 665.1,244.1 665.1,255.1 650.1,255.1 650.1,244.1
Outline: 135.4,355.35 139.9,355.35 139.9,421.35 142.4,421.35 142.4,426.35 135.4,426.35 arc90 134.4,425.35 134.4,356.35 arc90 135.4,355.35
Outline: 171.4,355.35 209.4,355.35 arc90 210.4,356.35 210.4,425.35 arc90 209.4,426.35 143.4,426.35 143.4,421.35 153.4,421.35 153.4,383.35 156.4,383.35 156.4,398.35 167.4,398.35 167.4,383.35 171.4,383.35 171.4,355.35
Outline: 39.4,355.35 131.4,355.35 arc90 132.4,356.35 132.4,425.35 arc90 131.4,426.35 39.4,426.35 arc90 38.4,425.35 38.4,356.35 arc90 39.4,355.35
Outline: 103.2,402.01 99.12,390.81 arc90 99.42,390.17 111.64,385.72 arc90 112.28,386.02 116,396.25 126.7,392.35 131.32,405.04 arc90 131.02,405.68 123.45,408.44 127.52,419.64 arc90 127.22,420.28 115.01,424.73 arc90 114.37,424.43 110.82,414.67 arc-90 110.17,414.37 100.41,417.93 arc90 99.77,417.63 95.32,405.41 arc90 95.62,404.77 103.2,402.01
Outline: 103.25,370.7 115.05,382.5 arc-90 115.75,382.5 127.55,370.7 arc-90 127.55,370 115.75,358.2 arc-90 115.05,358.2 103.25,370 arc-90 103.25,370.7
Outline: 96.9,361.35 100.9,361.35 arc90 101.4,361.85 101.4,378.85 arc90 100.9,379.35 96.9,379.35 arc90 96.4,378.85 96.4,361.85 arc90 96.9,361.35
Outline: 199.06,392.28 188.32,397.28 arc90 187.75,397.07 arc-90 187.08,396.83 173.28,403.27 arc-90 173.03,403.94 178.53,415.72 arc-90 179.19,415.96 191.89,410.04 arc90 192.56,410.28 arc-90 193.13,410.49 204.97,404.96 arc-90 205.22,404.3 199.72,392.52 arc-90 199.06,392.28
Outline: 199.72,389.18 205.22,377.4 arc-90 204.97,376.74 193.13,371.21 arc-90 192.56,371.42 arc90 191.89,371.66 179.19,365.74 arc-90 178.53,365.98 173.03,377.76 arc-90 173.28,378.43 187.08,384.87 arc-90 187.75,384.63 arc90 188.32,384.42 199.06,389.42 arc-90 199.72,389.18
Outline: 213.4,355.35 218.4,355.35 218.4,426.35 213.4,426.35 arc90 212.4,425.35 212.4,356.35 arc90 213.4,355.35
Outline: 220.4,355.35 257.4,355.35 arc90 258.4,356.35 258.4,425.35 arc90 257.4,426.35 220.4,426.35 220.4,355.35
Outline: 229.2,402.01 225.12,390.81 arc90 225.42,390.17 237.64,385.72 arc90 238.28,386.02 242,396.25 252.71,392.35 257.32,405.04 arc90 257.02,405.68 249.45,408.44 253.52,419.64 arc90 253.22,420.28 241.01,424.73 arc90 240.37,424.43 236.82,414.67 arc-90 236.18,414.37 226.41,417.93 arc90 225.77,417.63 221.32,405.41 arc90 221.62,404.77 229.2,402.01
Outline: 229.25,370.7 241.05,382.5 arc-90 241.75,382.5 253.55,370.7 arc-90 253.55,370 241.75,358.2 arc-90 241.05,358.2 229.25,370 arc-90 229.25,370.7
Outline: 222.9,361.35 226.9,361.35 arc90 227.4,361.85 227.4,378.85 arc90 226.9,379.35 222.9,379.35 arc90 222.4,378.85 222.4,361.85 arc90 222.9,361.35
Outline: 261.4,355.35 266.4,355.35 266.4,426.35 261.4,426.35 arc90 260.4,425.35 260.4,356.35 arc90 261.4,355.35
Outline: 268.4,355.35 305.4,355.35 arc90 306.4,356.35 306.4,425.35 arc90 305.4,426.35 268.4,426.35 268.4,355.35
Outline: 277.2,402.01 273.12,390.81 arc90 273.42,390.17 285.64,385.72 arc90 286.28,386.02 290,396.25 300.7,392.35 305.32,405.04 arc90 305.02,405.68 297.45,408.44 301.52,419.64 arc90 301.22,420.28 289.01,424.73 arc90 288.37,424.43 284.82,414.67 arc-90 284.18,414.37 274.41,417.93 arc90 273.77,417.63 269.32,405.41 arc90 269.62,404.77 277.2,402.01
Outline: 277.25,370.7 289.05,382.5 arc-90 289.75,382.5 301.55,370.7 arc-90 301.55,370 289.75,358.2 arc-90 289.05,358.2 277.25,370 arc-90 277.25,370.7
Outline: 270.9,361.35 274.9,361.35 arc90 275.4,361.85 275.4,378.85 arc90 274.9,379.35 270.9,379.35 arc90 270.4,378.85 270.4,361.85 arc90 270.9,361.35
Outline: 309.4,355.35 313.9,355.35 313.9,421.35 316.4,421.35 316.4,426.35 309.4,426.35 arc90 308.4,425.35 308.4,356.35 arc90 309.4,355.35
Outline: 345.4,355.35 383.4,355.35 arc90 384.4,356.35 384.4,425.35 arc90 383.4,426.35 317.4,426.35 317.4,421.35 327.4,421.35 327.4,383.35 330.4,383.35 330.4,398.35 341.4,398.35 341.4,383.35 345.4,383.35 345.4,355.35
Outline: 373.06,392.28 362.32,397.28 arc90 361.75,397.07 arc-90 361.08,396.83 347.28,403.27 arc-90 347.04,403.94 352.53,415.72 arc-90 353.19,415.96 365.89,410.04 arc90 366.56,410.28 arc-90 367.13,410.49 378.98,404.96 arc-90 379.22,404.3 373.72,392.52 arc-90 373.06,392.28
Outline: 373.72,389.18 379.22,377.4 arc-90 378.98,376.74 367.13,371.21 arc-90 366.56,371.42 arc90 365.89,371.66 353.19,365.74 arc-90 352.53,365.98 347.04,377.76 arc-90 347.28,378.43 361.08,384.87 arc-90 361.75,384.63 arc90 362.32,384.42 373.06,389.42 arc-90 373.72,389.18
Outline: 504.4,355.35 550.4,355.35 557.4,355.35 arc90 558.4,356.35 558.4,425.35 arc90 557.4,426.35 544.4,426.35 530.4,426.35 530.4,421.35 511.4,421.35 511.4,426.35 504.4,426.35 arc90 503.4,425.35 503.4,356.35 arc90 504.4,355.35
Outline: 554.4,383.35 554.4,398.35 543.4,398.35 543.4,383.35 554.4,383.35
Outline: 387.4,355.35 433.4,355.35 440.4,355.35 arc90 441.4,356.35 441.4,425.35 arc90 440.4,426.35 427.4,426.35 413.4,426.35 394.4,426.35 387.4,426.35 arc90 386.4,425.35 386.4,356.35 arc90 387.4,355.35
Outline: 445.65,355.35 491.65,355.35 498.65,355.35 arc90 499.65,356.35 499.65,425.35 arc90 498.65,426.35 485.65,426.35 471.65,426.35 471.65,421.35 452.65,421.35 452.65,426.35 445.65,426.35 arc90 444.65,425.35 444.65,356.35 arc90 445.65,355.35
Outline: 495.65,383.35 495.65,398.35 484.65,398.35 484.65,383.35 495.65,383.35
Outline: 561.4,355.35 653.4,355.35 arc90 654.4,356.35 654.4,425.35 arc90 653.4,426.35 561.4,426.35 arc90 560.4,425.35 560.4,356.35 arc90 561.4,355.35
Outline: 625.2,402.01 621.12,390.81 arc90 621.42,390.17 633.64,385.72 arc90 634.28,386.02 638,396.25 648.71,392.35 653.32,405.04 arc90 653.02,405.68 645.45,408.44 649.52,419.64 arc90 649.22,420.28 637.01,424.73 arc90 636.37,424.43 632.82,414.67 arc-90 632.17,414.37 622.41,417.93 arc90 621.77,417.63 617.32,405.41 arc90 617.62,404.77 625.2,402.01
Outline: 625.25,370.7 637.05,382.5 arc-90 637.75,382.5 649.55,370.7 arc-90 649.55,370 637.75,358.2 arc-90 637.05,358.2 625.25,370 arc-90 625.25,370.7
Outline: 618.9,361.35 622.9,361.35 arc90 623.4,361.85 623.4,378.85 arc90 622.9,379.35 618.9,379.35 arc90 618.4,378.85 618.4,361.85 arc90 618.9,361.35
Outline: 657.4,355.35 662.4,355.35 662.4,426.35 657.4,426.35 arc90 656.4,425.35 656.4,356.35 arc90 657.4,355.35
Outline: 664.4,355.35 701.4,355.35 arc90 702.4,356.35 702.4,425.35 arc90 701.4,426.35 664.4,426.35 664.4,355.35
Outline: 673.2,402.01 669.12,390.81 arc90 669.42,390.17 681.64,385.72 arc90 682.28,386.02 686,396.25 696.71,392.35 701.32,405.04 arc90 701.02,405.68 693.45,408.44 697.52,419.64 arc90 697.22,420.28 685.01,424.73 arc90 684.37,424.43 680.82,414.67 arc-90 680.17,414.37 670.41,417.93 arc90 669.77,417.63 665.32,405.41 arc90 665.62,404.77 673.2,402.01
Outline: 673.25,370.7 685.05,382.5 arc-90 685.75,382.5 697.55,370.7 arc-90 697.55,370 685.75,358.2 arc-90 685.05,358.2 673.25,370 arc-90 673.25,370.7
Outline: 666.9,361.35 670.9,361.35 arc90 671.4,361.85 671.4,378.85 arc90 670.9,379.35 666.9,379.35 arc90 666.4,378.85 666.4,361.85 arc90 666.9,361.35
Copper layers (1*16): Top 0.035mm / dielectric 1.5mm / Bottom 0.035mm
Design rules "default": minimum track width 10mil, minimum drill 24mil, track to track 8mil, track to pad 8mil, pad to pad 8mil, via to via 8mil, smd to smd 8mil, copper to edge 40mil, drill to drill 8mil, minimum pad ring 10mil, minimum via ring 8mil, stop-mask expansion 4mil, vias tented up to drill 0mil, thermal gap 10mil

## Footprints (pad centres in the part's own frame; a part is rotated, then mirrored left to right if it is on the bottom)
2,8 = hole 2.8: 0,0

## Placement (x,y rotation side)
H1  MOUNT-HOLE2.8  [2,8]  42.1,10.35 0 top
H2  MOUNT-HOLE2.8  [2,8]  105.1,10.35 0 top
H3  MOUNT-HOLE2.8  [2,8]  105.1,40.35 0 top
H4  MOUNT-HOLE2.8  [2,8]  42.1,79.35 0 top
H5  MOUNT-HOLE2.8  [2,8]  105.1,79.35 0 top
H6  MOUNT-HOLE2.8  [2,8]  42.1,88.35 0 top
H7  MOUNT-HOLE2.8  [2,8]  105.1,88.35 0 top
H8  MOUNT-HOLE2.8  [2,8]  105.1,118.35 0 top
H9  MOUNT-HOLE2.8  [2,8]  42.1,175.35 0 top
H10  MOUNT-HOLE2.8  [2,8]  105.1,175.35 0 top
H11  MOUNT-HOLE2.8  [2,8]  115.1,136.35 0 top
H12  MOUNT-HOLE2.8  [2,8]  178.1,136.35 0 top
H13  MOUNT-HOLE2.8  [2,8]  178.1,166.35 0 top
H14  MOUNT-HOLE2.8  [2,8]  115.1,175.35 0 top
H15  MOUNT-HOLE2.8  [2,8]  178.1,175.35 0 top
H16  MOUNT-HOLE2.8  [2,8]  188.1,175.35 0 top
H17  MOUNT-HOLE2.8  [2,8]  251.1,175.35 0 top
H18  MOUNT-HOLE2.8  [2,8]  115.1,88.35 0 top
H19  MOUNT-HOLE2.8  [2,8]  188.1,58.35 0 top
H20  MOUNT-HOLE2.8  [2,8]  251.1,58.35 0 top
H21  MOUNT-HOLE2.8  [2,8]  178.1,88.35 0 top
H22  MOUNT-HOLE2.8  [2,8]  178.1,118.35 0 top
H23  MOUNT-HOLE2.8  [2,8]  188.1,117.1 0 top
H24  MOUNT-HOLE2.8  [2,8]  251.1,117.1 0 top
H25  MOUNT-HOLE2.8  [2,8]  115.1,127.35 0 top
H26  MOUNT-HOLE2.8  [2,8]  178.1,127.35 0 top
H27  MOUNT-HOLE2.8  [2,8]  115.1,10.35 0 top
H28  MOUNT-HOLE2.8  [2,8]  178.1,10.35 0 top
H29  MOUNT-HOLE2.8  [2,8]  178.1,40.35 0 top
H30  MOUNT-HOLE2.8  [2,8]  115.1,79.35 0 top
H31  MOUNT-HOLE2.8  [2,8]  178.1,79.35 0 top
H32  MOUNT-HOLE2.8  [2,8]  261.1,10.35 0 top
H33  MOUNT-HOLE2.8  [2,8]  324.1,10.35 0 top
H34  MOUNT-HOLE2.8  [2,8]  324.1,40.35 0 top
H35  MOUNT-HOLE2.8  [2,8]  261.1,79.35 0 top
H36  MOUNT-HOLE2.8  [2,8]  324.1,79.35 0 top
H37  MOUNT-HOLE2.8  [2,8]  261.1,88.35 0 top
H38  MOUNT-HOLE2.8  [2,8]  324.1,88.35 0 top
H39  MOUNT-HOLE2.8  [2,8]  324.1,118.35 0 top
H40  MOUNT-HOLE2.8  [2,8]  261.1,175.35 0 top
H41  MOUNT-HOLE2.8  [2,8]  324.1,175.35 0 top
H42  MOUNT-HOLE2.8  [2,8]  407.1,58.35 0 top
H43  MOUNT-HOLE2.8  [2,8]  470.1,58.35 0 top
H44  MOUNT-HOLE2.8  [2,8]  407.1,175.35 0 top
H45  MOUNT-HOLE2.8  [2,8]  470.1,175.35 0 top
H46  MOUNT-HOLE2.8  [2,8]  334.1,136.35 0 top
H47  MOUNT-HOLE2.8  [2,8]  397.1,136.35 0 top
H48  MOUNT-HOLE2.8  [2,8]  397.1,166.35 0 top
H49  MOUNT-HOLE2.8  [2,8]  334.1,175.35 0 top
H50  MOUNT-HOLE2.8  [2,8]  397.1,175.35 0 top
H51  MOUNT-HOLE2.8  [2,8]  334.1,88.35 0 top
H52  MOUNT-HOLE2.8  [2,8]  397.1,88.35 0 top
H53  MOUNT-HOLE2.8  [2,8]  397.1,118.35 0 top
H54  MOUNT-HOLE2.8  [2,8]  334.1,127.35 0 top
H55  MOUNT-HOLE2.8  [2,8]  397.1,127.35 0 top
H56  MOUNT-HOLE2.8  [2,8]  334.1,10.35 0 top
H57  MOUNT-HOLE2.8  [2,8]  397.1,10.35 0 top
H58  MOUNT-HOLE2.8  [2,8]  397.1,40.35 0 top
H59  MOUNT-HOLE2.8  [2,8]  334.1,79.35 0 top
H60  MOUNT-HOLE2.8  [2,8]  397.1,79.35 0 top
H61  MOUNT-HOLE2.8  [2,8]  407.1,117.1 0 top
H62  MOUNT-HOLE2.8  [2,8]  470.1,117.1 0 top
H63  MOUNT-HOLE2.8  [2,8]  480.1,10.35 0 top
H64  MOUNT-HOLE2.8  [2,8]  543.1,10.35 0 top
H65  MOUNT-HOLE2.8  [2,8]  543.1,40.35 0 top
H66  MOUNT-HOLE2.8  [2,8]  480.1,79.35 0 top
H67  MOUNT-HOLE2.8  [2,8]  543.1,79.35 0 top
H68  MOUNT-HOLE2.8  [2,8]  480.1,88.35 0 top
H69  MOUNT-HOLE2.8  [2,8]  543.1,88.35 0 top
H70  MOUNT-HOLE2.8  [2,8]  543.1,118.35 0 top
H71  MOUNT-HOLE2.8  [2,8]  480.1,175.35 0 top
H72  MOUNT-HOLE2.8  [2,8]  543.1,175.35 0 top
H73  MOUNT-HOLE2.8  [2,8]  626.1,58.35 0 top
H74  MOUNT-HOLE2.8  [2,8]  689.1,58.35 0 top
H75  MOUNT-HOLE2.8  [2,8]  626.1,175.35 0 top
H76  MOUNT-HOLE2.8  [2,8]  689.1,175.35 0 top
H77  MOUNT-HOLE2.8  [2,8]  553.1,136.35 0 top
H78  MOUNT-HOLE2.8  [2,8]  616.1,136.35 0 top
H79  MOUNT-HOLE2.8  [2,8]  616.1,166.35 0 top
H80  MOUNT-HOLE2.8  [2,8]  553.1,175.35 0 top
H81  MOUNT-HOLE2.8  [2,8]  616.1,175.35 0 top
H82  MOUNT-HOLE2.8  [2,8]  553.1,88.35 0 top
H83  MOUNT-HOLE2.8  [2,8]  616.1,88.35 0 top
H84  MOUNT-HOLE2.8  [2,8]  616.1,118.35 0 top
H85  MOUNT-HOLE2.8  [2,8]  553.1,127.35 0 top
H86  MOUNT-HOLE2.8  [2,8]  616.1,127.35 0 top
H87  MOUNT-HOLE2.8  [2,8]  553.1,10.35 0 top
H88  MOUNT-HOLE2.8  [2,8]  616.1,10.35 0 top
H89  MOUNT-HOLE2.8  [2,8]  616.1,40.35 0 top
H90  MOUNT-HOLE2.8  [2,8]  553.1,79.35 0 top
H91  MOUNT-HOLE2.8  [2,8]  616.1,79.35 0 top
H92  MOUNT-HOLE2.8  [2,8]  626.1,117.1 0 top
H93  MOUNT-HOLE2.8  [2,8]  689.1,117.1 0 top
H94  MOUNT-HOLE2.8  [2,8]  42.1,185.35 0 top
H95  MOUNT-HOLE2.8  [2,8]  105.1,185.35 0 top
H96  MOUNT-HOLE2.8  [2,8]  105.1,215.35 0 top
H97  MOUNT-HOLE2.8  [2,8]  42.1,254.35 0 top
H98  MOUNT-HOLE2.8  [2,8]  105.1,254.35 0 top
H99  MOUNT-HOLE2.8  [2,8]  42.1,263.35 0 top
H100  MOUNT-HOLE2.8  [2,8]  105.1,263.35 0 top
H101  MOUNT-HOLE2.8  [2,8]  105.1,293.35 0 top
H102  MOUNT-HOLE2.8  [2,8]  42.1,350.35 0 top
H103  MOUNT-HOLE2.8  [2,8]  105.1,350.35 0 top
H104  MOUNT-HOLE2.8  [2,8]  188.1,233.35 0 top
H105  MOUNT-HOLE2.8  [2,8]  251.1,233.35 0 top
H106  MOUNT-HOLE2.8  [2,8]  188.1,350.35 0 top
H107  MOUNT-HOLE2.8  [2,8]  251.1,350.35 0 top
H108  MOUNT-HOLE2.8  [2,8]  115.1,311.35 0 top
H109  MOUNT-HOLE2.8  [2,8]  178.1,311.35 0 top
H110  MOUNT-HOLE2.8  [2,8]  178.1,341.35 0 top
H111  MOUNT-HOLE2.8  [2,8]  115.1,350.35 0 top
H112  MOUNT-HOLE2.8  [2,8]  178.1,350.35 0 top
H113  MOUNT-HOLE2.8  [2,8]  115.1,263.35 0 top
H114  MOUNT-HOLE2.8  [2,8]  178.1,263.35 0 top
H115  MOUNT-HOLE2.8  [2,8]  178.1,293.35 0 top
H116  MOUNT-HOLE2.8  [2,8]  115.1,302.35 0 top
H117  MOUNT-HOLE2.8  [2,8]  178.1,302.35 0 top
H118  MOUNT-HOLE2.8  [2,8]  115.1,185.35 0 top
H119  MOUNT-HOLE2.8  [2,8]  178.1,185.35 0 top
H120  MOUNT-HOLE2.8  [2,8]  178.1,215.35 0 top
H121  MOUNT-HOLE2.8  [2,8]  115.1,254.35 0 top
H122  MOUNT-HOLE2.8  [2,8]  178.1,254.35 0 top
H123  MOUNT-HOLE2.8  [2,8]  188.1,292.1 0 top
H124  MOUNT-HOLE2.8  [2,8]  251.1,292.1 0 top
H125  MOUNT-HOLE2.8  [2,8]  261.1,185.35 0 top
H126  MOUNT-HOLE2.8  [2,8]  324.1,185.35 0 top
H127  MOUNT-HOLE2.8  [2,8]  324.1,215.35 0 top
H128  MOUNT-HOLE2.8  [2,8]  261.1,254.35 0 top
H129  MOUNT-HOLE2.8  [2,8]  324.1,254.35 0 top
H130  MOUNT-HOLE2.8  [2,8]  261.1,263.35 0 top
H131  MOUNT-HOLE2.8  [2,8]  324.1,263.35 0 top
H132  MOUNT-HOLE2.8  [2,8]  324.1,293.35 0 top
H133  MOUNT-HOLE2.8  [2,8]  261.1,350.35 0 top
H134  MOUNT-HOLE2.8  [2,8]  324.1,350.35 0 top
H135  MOUNT-HOLE2.8  [2,8]  407.1,233.35 0 top
H136  MOUNT-HOLE2.8  [2,8]  470.1,233.35 0 top
H137  MOUNT-HOLE2.8  [2,8]  407.1,350.35 0 top
H138  MOUNT-HOLE2.8  [2,8]  470.1,350.35 0 top
H139  MOUNT-HOLE2.8  [2,8]  334.1,311.35 0 top
H140  MOUNT-HOLE2.8  [2,8]  397.1,311.35 0 top
H141  MOUNT-HOLE2.8  [2,8]  397.1,341.35 0 top
H142  MOUNT-HOLE2.8  [2,8]  334.1,350.35 0 top
H143  MOUNT-HOLE2.8  [2,8]  397.1,350.35 0 top
H144  MOUNT-HOLE2.8  [2,8]  334.1,263.35 0 top
H145  MOUNT-HOLE2.8  [2,8]  397.1,263.35 0 top
H146  MOUNT-HOLE2.8  [2,8]  397.1,293.35 0 top
H147  MOUNT-HOLE2.8  [2,8]  334.1,302.35 0 top
H148  MOUNT-HOLE2.8  [2,8]  397.1,302.35 0 top
H149  MOUNT-HOLE2.8  [2,8]  334.1,185.35 0 top
H150  MOUNT-HOLE2.8  [2,8]  397.1,185.35 0 top
H151  MOUNT-HOLE2.8  [2,8]  397.1,215.35 0 top
H152  MOUNT-HOLE2.8  [2,8]  334.1,254.35 0 top
H153  MOUNT-HOLE2.8  [2,8]  397.1,254.35 0 top
H154  MOUNT-HOLE2.8  [2,8]  407.1,292.1 0 top
H155  MOUNT-HOLE2.8  [2,8]  470.1,292.1 0 top
H156  MOUNT-HOLE2.8  [2,8]  480.1,185.35 0 top
H157  MOUNT-HOLE2.8  [2,8]  543.1,185.35 0 top
H158  MOUNT-HOLE2.8  [2,8]  543.1,215.35 0 top
H159  MOUNT-HOLE2.8  [2,8]  480.1,254.35 0 top
H160  MOUNT-HOLE2.8  [2,8]  543.1,254.35 0 top
H161  MOUNT-HOLE2.8  [2,8]  480.1,263.35 0 top
H162  MOUNT-HOLE2.8  [2,8]  543.1,263.35 0 top
H163  MOUNT-HOLE2.8  [2,8]  543.1,293.35 0 top
H164  MOUNT-HOLE2.8  [2,8]  480.1,350.35 0 top
H165  MOUNT-HOLE2.8  [2,8]  543.1,350.35 0 top
H166  MOUNT-HOLE2.8  [2,8]  626.1,233.35 0 top
H167  MOUNT-HOLE2.8  [2,8]  689.1,233.35 0 top
H168  MOUNT-HOLE2.8  [2,8]  626.1,350.35 0 top
H169  MOUNT-HOLE2.8  [2,8]  689.1,350.35 0 top
H170  MOUNT-HOLE2.8  [2,8]  553.1,311.35 0 top
H171  MOUNT-HOLE2.8  [2,8]  616.1,311.35 0 top
H172  MOUNT-HOLE2.8  [2,8]  616.1,341.35 0 top
H173  MOUNT-HOLE2.8  [2,8]  553.1,350.35 0 top
H174  MOUNT-HOLE2.8  [2,8]  616.1,350.35 0 top
H175  MOUNT-HOLE2.8  [2,8]  553.1,263.35 0 top
H176  MOUNT-HOLE2.8  [2,8]  616.1,263.35 0 top
H177  MOUNT-HOLE2.8  [2,8]  616.1,293.35 0 top
H178  MOUNT-HOLE2.8  [2,8]  553.1,302.35 0 top
H179  MOUNT-HOLE2.8  [2,8]  616.1,302.35 0 top
H180  MOUNT-HOLE2.8  [2,8]  553.1,185.35 0 top
H181  MOUNT-HOLE2.8  [2,8]  616.1,185.35 0 top
H182  MOUNT-HOLE2.8  [2,8]  616.1,215.35 0 top
H183  MOUNT-HOLE2.8  [2,8]  553.1,254.35 0 top
H184  MOUNT-HOLE2.8  [2,8]  616.1,254.35 0 top
H185  MOUNT-HOLE2.8  [2,8]  626.1,292.1 0 top
H186  MOUNT-HOLE2.8  [2,8]  689.1,292.1 0 top
H187  MOUNT-HOLE2.8  [2,8]  206.4,359.35 90 top
H188  MOUNT-HOLE2.8  [2,8]  206.4,422.35 90 top
H189  MOUNT-HOLE2.8  [2,8]  176.4,422.35 90 top
H190  MOUNT-HOLE2.8  [2,8]  137.4,359.35 90 top
H191  MOUNT-HOLE2.8  [2,8]  137.4,422.35 90 top
H192  MOUNT-HOLE2.8  [2,8]  128.4,359.35 90 top
H193  MOUNT-HOLE2.8  [2,8]  128.4,422.35 90 top
H194  MOUNT-HOLE2.8  [2,8]  98.4,422.35 90 top
H195  MOUNT-HOLE2.8  [2,8]  41.4,359.35 90 top
H196  MOUNT-HOLE2.8  [2,8]  41.4,422.35 90 top
H197  MOUNT-HOLE2.8  [2,8]  254.4,359.35 90 top
H198  MOUNT-HOLE2.8  [2,8]  254.4,422.35 90 top
H199  MOUNT-HOLE2.8  [2,8]  224.4,422.35 90 top
H200  MOUNT-HOLE2.8  [2,8]  215.4,359.35 90 top
H201  MOUNT-HOLE2.8  [2,8]  215.4,422.35 90 top
H202  MOUNT-HOLE2.8  [2,8]  302.4,359.35 90 top
H203  MOUNT-HOLE2.8  [2,8]  302.4,422.35 90 top
H204  MOUNT-HOLE2.8  [2,8]  272.4,422.35 90 top
H205  MOUNT-HOLE2.8  [2,8]  263.4,359.35 90 top
H206  MOUNT-HOLE2.8  [2,8]  263.4,422.35 90 top
H207  MOUNT-HOLE2.8  [2,8]  380.4,359.35 90 top
H208  MOUNT-HOLE2.8  [2,8]  380.4,422.35 90 top
H209  MOUNT-HOLE2.8  [2,8]  350.4,422.35 90 top
H210  MOUNT-HOLE2.8  [2,8]  311.4,359.35 90 top
H211  MOUNT-HOLE2.8  [2,8]  311.4,422.35 90 top
H212  MOUNT-HOLE2.8  [2,8]  506.4,359.35 90 top
H213  MOUNT-HOLE2.8  [2,8]  506.4,422.35 90 top
H214  MOUNT-HOLE2.8  [2,8]  389.4,359.35 90 top
H215  MOUNT-HOLE2.8  [2,8]  389.4,422.35 90 top
H216  MOUNT-HOLE2.8  [2,8]  447.65,359.35 90 top
H217  MOUNT-HOLE2.8  [2,8]  447.65,422.35 90 top
H218  MOUNT-HOLE2.8  [2,8]  698.4,359.35 90 top
H219  MOUNT-HOLE2.8  [2,8]  698.4,422.35 90 top
H220  MOUNT-HOLE2.8  [2,8]  668.4,422.35 90 top
H221  MOUNT-HOLE2.8  [2,8]  659.4,359.35 90 top
H222  MOUNT-HOLE2.8  [2,8]  659.4,422.35 90 top
H223  MOUNT-HOLE2.8  [2,8]  650.4,359.35 90 top
H224  MOUNT-HOLE2.8  [2,8]  650.4,422.35 90 top
H225  MOUNT-HOLE2.8  [2,8]  620.4,422.35 90 top
H226  MOUNT-HOLE2.8  [2,8]  563.4,359.35 90 top
H227  MOUNT-HOLE2.8  [2,8]  563.4,422.35 90 top

## Library data of the parts
H1-H227 = holes

## Text on the board
Dimension: 1" square / reference